# Altium PCB blackfin_pcb.PcbDoc (part 4 of 4)
Units mil, origin at the board's own origin, x right, y up, seen from the top; angles counter-clockwise.
Board outline 4330.71 x 5905.51 mil, 4 copper layers (Top Layer, GROUND, POWER, Bottom Layer), stack 59.76 mil thick; 381 components, 314 nets, 1218 pads, 647 vias.
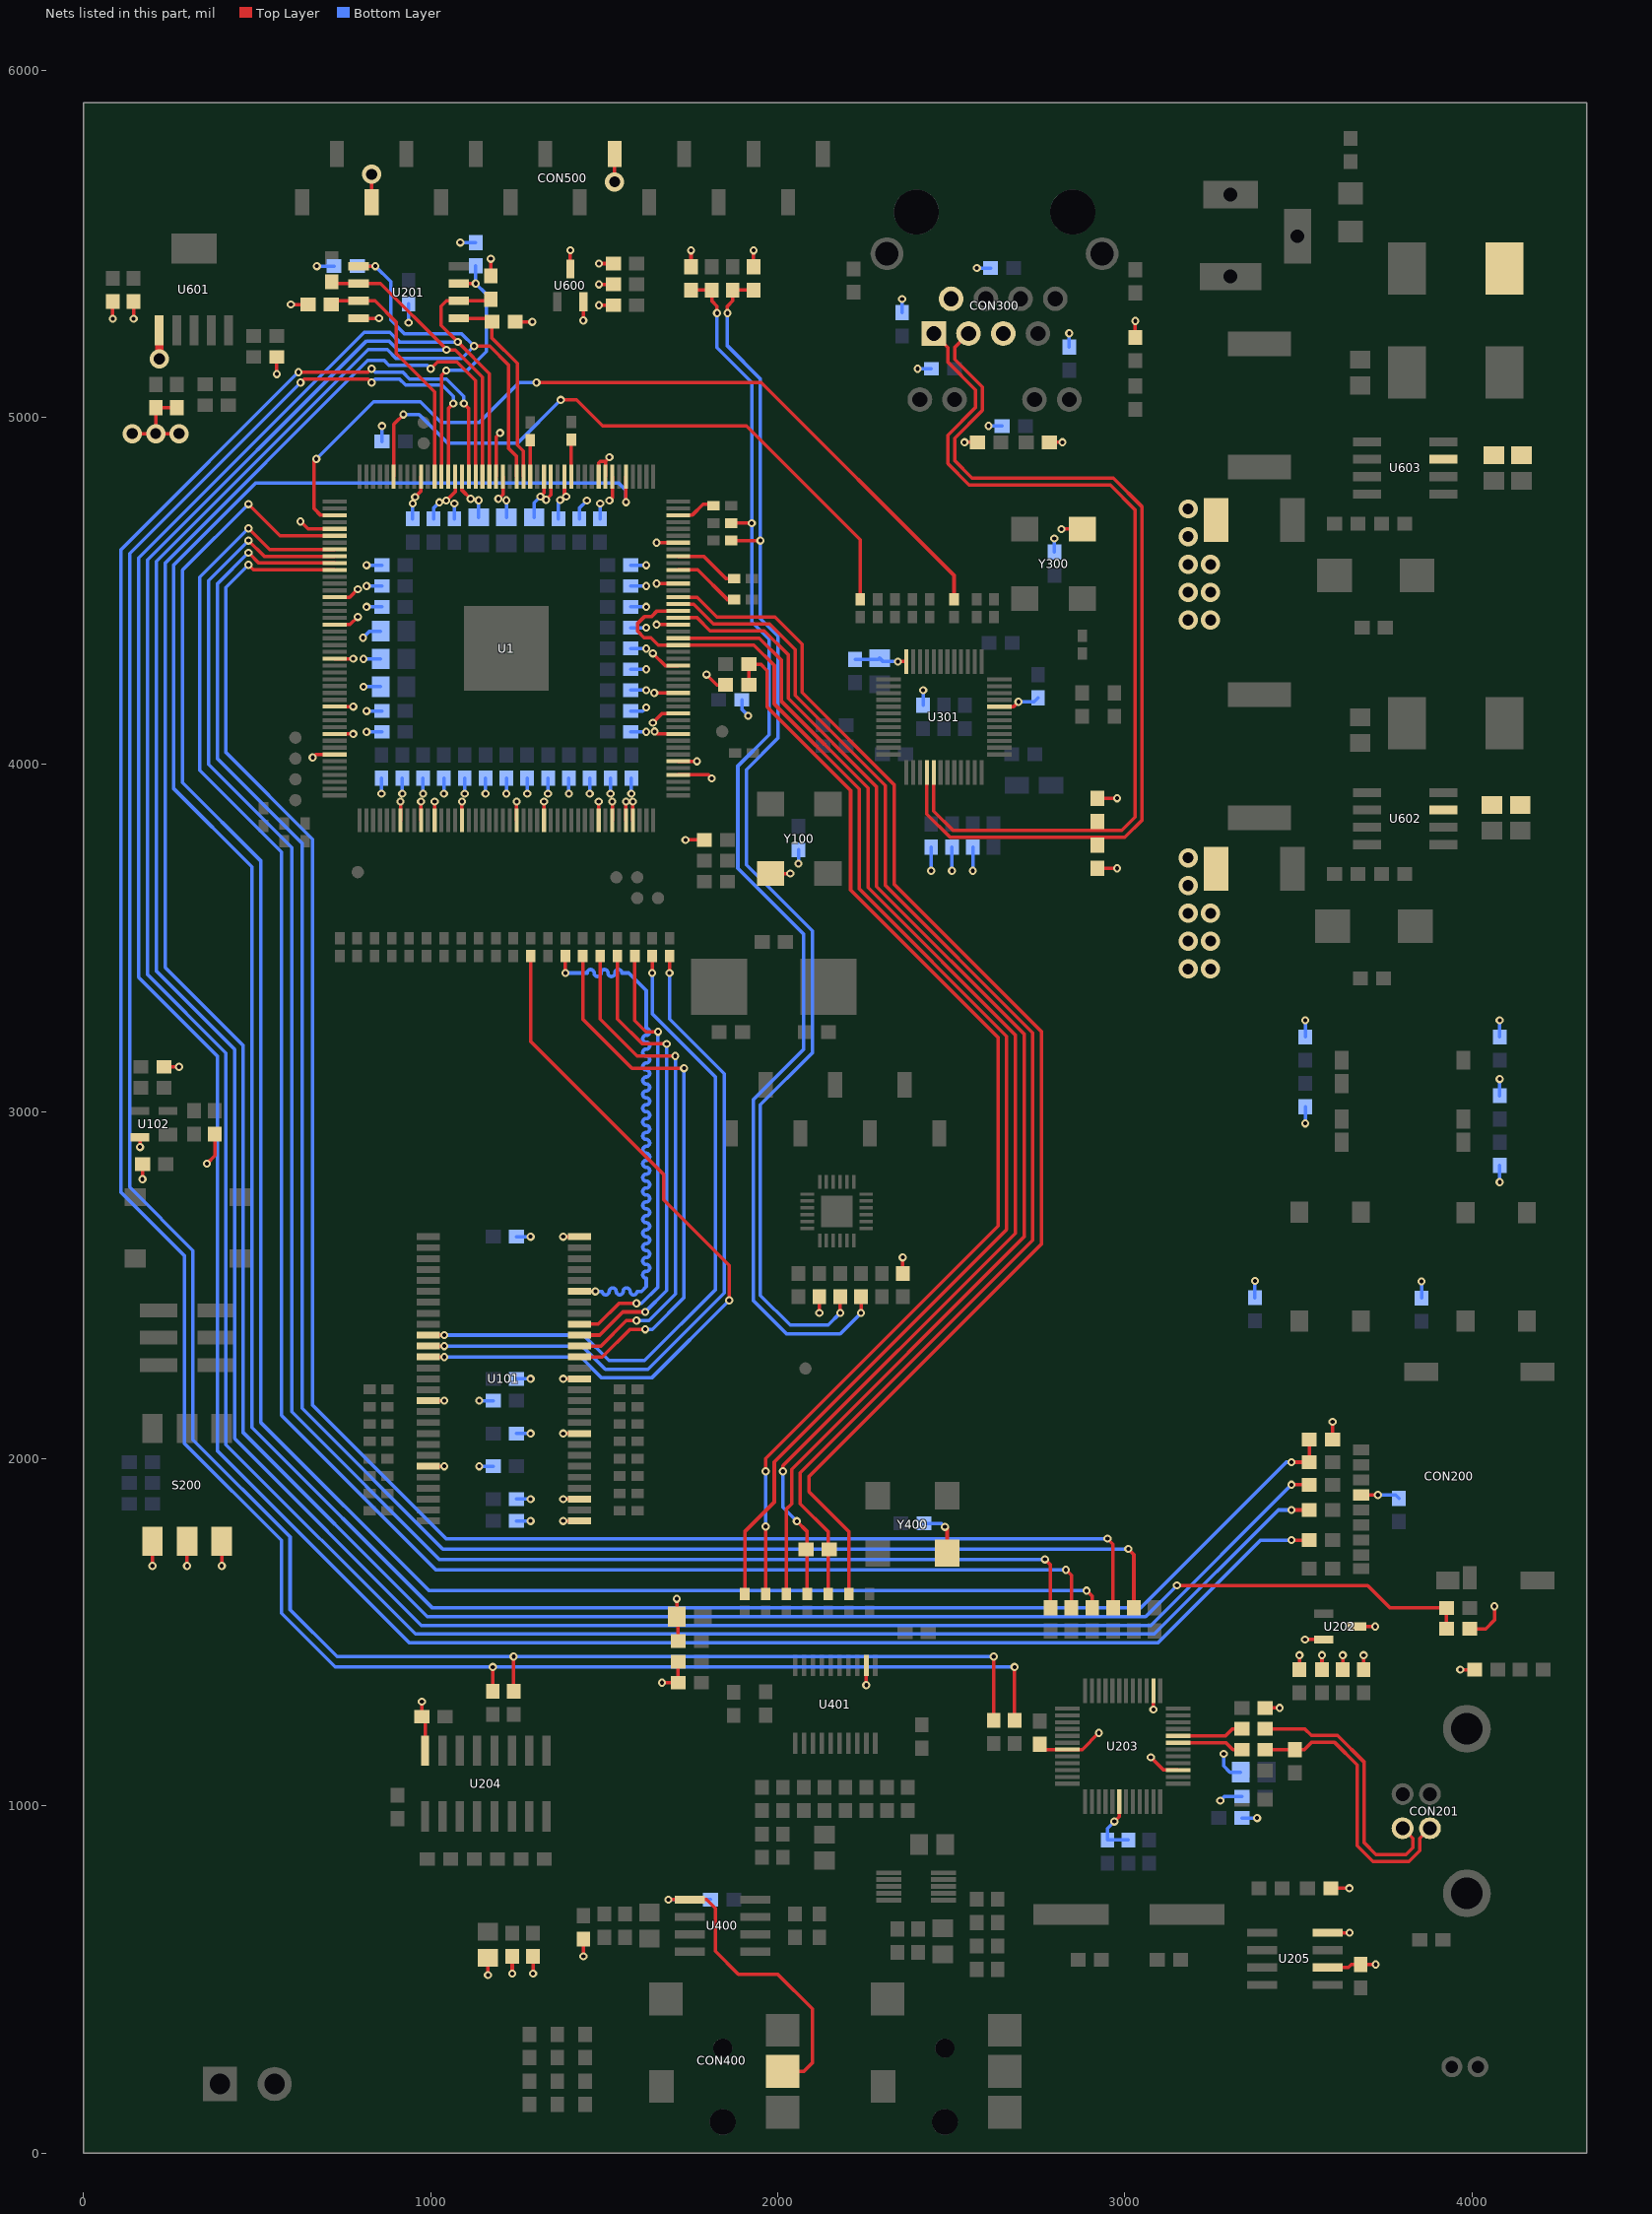
[diagram p6: the nets of this part, all layers, seen from the top]

## Via types
v1: diameter 23.62, hole 11.81, Top Layer to Bottom Layer, tented both sides, 566 vias
v2: diameter 55.12, hole 31.5, Top Layer to Bottom Layer, 36 vias
v3: diameter 25.98, hole 12.99, Top Layer to Bottom Layer, tented top, 29 vias
v4: diameter 157.48, hole 98.43, Top Layer to Bottom Layer, 8 vias
v5: diameter 55.12, hole 31.5, Top Layer to Bottom Layer, tented both sides, 4 vias
v6: diameter 137.8, hole 90.55, Top Layer to Bottom Layer, 4 vias

## Nets (pads, with @x,y where several pads share a name; then routed paths per layer and width w, separated by ;. In a path a pad name is that pad's centre, name@x,y a point inside that pad or via, vN(x,y) a via of type N, cw(c..) or ccw(c..) an arc to the next point about the centre after c; other vN are vias at no path point) (continued)
RXER: R315.1 U1.47 | length 2490.6
  Top Layer w10: v1(670.65,4880.3) 663.49,4873.13 663.49,4737.34 682.99,4717.83 U1.47@723.03,4717.83 ; v1(1305,5100) 1952.57,5100 2508,4544.57 R315.1@2508,4475.59
  Bottom Layer w10: v1(670.65,4880.3) 835.36,5045 970,5045 1030,4985 1140,4985 1255,5100 v1(1305,5100)
SA10: R139.1 U101.22 | length 1879.5
  Top Layer w10: v1(1388.11,3399.33) R139.1@1388.11,3448.39 ; U101.22@1428.26,2482.13 v1(1474.44,2482.13)
  Bottom Layer w10: v1(1388.11,3399.33) 1388.11,3399.22 1410.78,3399.22 1450.78,3399.22 cw(c1460.78,3399.22) 1470.78,3399.22 ccw(c1480.78,3399.22) 1490.78,3399.22 cw(c1500.78,3399.22) 1510.78,3399.22 ccw(c1520.78,3399.22) 1530.78,3399.22 cw(c1540.78,3399.22) 1550.78,3399.22 1570.78,3399.22 1621.02,3348.98 1621.02,3239.8 cw(c1621.02,3229.8) 1621.02,3219.8 ccw(c1621.02,3209.8) 1621.02,3199.8 cw(c1621.02,3189.8) 1621.02,3179.8 ccw(c1621.02,3169.8) 1621.02,3159.8 cw(c1621.02,3149.8) 1621.02,3139.8 ccw(c1621.02,3129.8) 1621.02,3119.8 cw(c1621.02,3109.8) 1621.02,3099.8 ccw(c1621.02,3089.8) 1621.02,3079.8 cw(c1621.02,3069.8) 1621.02,3059.8 ccw(c1621.02,3049.8) 1621.02,3039.8 cw(c1621.02,3029.8) 1621.02,3019.8 ccw(c1621.02,3009.8) 1621.02,2999.8 cw(c1621.02,2989.8) 1621.02,2979.8 ccw(c1621.02,2969.8) 1621.02,2959.8 cw(c1621.02,2949.8) 1621.02,2939.8 ccw(c1621.02,2929.8) 1621.02,2919.8 cw(c1621.02,2909.8) 1621.02,2899.8 ccw(c1621.02,2889.8) 1621.02,2879.8 cw(c1621.02,2869.8) 1621.02,2859.8 ccw(c1621.02,2849.8) 1621.02,2839.8 cw(c1621.02,2829.8) 1621.02,2819.8 ccw(c1621.02,2809.8) 1621.02,2799.8 cw(c1621.02,2789.8) 1621.02,2779.8 ccw(c1621.02,2769.8) 1621.02,2759.8 cw(c1621.02,2749.8) 1621.02,2739.8 ccw(c1621.02,2729.8) 1621.02,2719.8 cw(c1621.02,2709.8) 1621.02,2699.8 ccw(c1621.02,2689.8) 1621.02,2679.8 cw(c1621.02,2669.8) 1621.02,2659.8 ccw(c1621.02,2649.8) 1621.02,2639.8 cw(c1621.02,2629.8) 1621.02,2619.8 ccw(c1621.02,2609.8) 1621.02,2599.8 cw(c1621.02,2589.8) 1621.02,2579.8 ccw(c1621.02,2569.8) 1621.02,2559.8 cw(c1621.02,2549.8) 1621.02,2539.8 ccw(c1621.02,2529.8) 1621.02,2519.8 1621.02,2496.02 1607.13,2482.13 1594.44,2482.13 cw(c1584.44,2482.13) 1574.44,2482.13 ccw(c1564.44,2482.13) 1554.44,2482.13 cw(c1544.44,2482.13) 1534.44,2482.13 ccw(c1524.44,2482.13) 1514.44,2482.13 cw(c1504.44,2482.13) 1494.44,2482.13 v1(1474.44,2482.13)
SCAS: R141.1 U101.17 | length 1467.2
  Top Layer w10: U101.17@1428.26,2324.65 1490.46,2324.65 1563.66,2397.84 v1(1592.95,2397.84) ; R141.1@1488.11,3448.39 1488.11,3266.89 1595,3160 v1(1705,3160)
  Bottom Layer w10: v1(1592.95,2397.84) 1628.66,2397.84 1705,2474.18 v1(1705,3160)
SCKE: R135.1 U101.37 | length 1979.4
  Top Layer w10: U101.37@993.22,2356.14 v1(1039.41,2356.14) ; v1(1638.11,3399.33) R135.1@1638.11,3448.39
  Bottom Layer w10: v1(1039.41,2356.14) 1440.37,2356.14 1513.66,2282.84 1616.02,2282.84 1821.02,2487.84 1821.02,3098.98 1638.11,3281.89 v1(1638.11,3399.33)
SCL: R200.1 R202.1 R500.2 R504.2 | length 3695.2
  Top Layer w10: R200.1@1750.18,5366.54 R500.2@1810.18,5366.54 1810.18,5334.81 1825,5320 v1(1825,5300) ; R202.1@1865.59,4695 v1(1925,4695) ; v1(2240,2420) R504.2@2240,2466.54
  Bottom Layer w10: v1(1825,5300) 1825,5200.47 1925,5100.47 ; 1925,5100 v1(1925,4695) 1925,4410.47 1975,4360.47 1975,4085.36 1885,3995.36 1885,3700.36 2075,3510.36 2075,3179.64 1930,3034.64 1930,2455.47 2025.47,2360 2180,2360 v1(2240,2420)
SCLK: R145.2 U101.38 | length 2007.8
  Top Layer w10: U101.38@993.22,2324.65 v1(1039.41,2324.65) ; v1(1688.11,3399.33) R145.2@1688.11,3448.39
  Bottom Layer w10: v1(1039.41,2324.65) 1436.51,2324.65 1503.31,2257.84 1626.38,2257.84 1846.02,2477.49 1846.02,3108.98 1688.11,3266.89 v1(1688.11,3399.33)
SDA: R201.1 R203.1 R501.2 R503.2 | length 3611.2
  Top Layer w10: v1(1855,5300) 1855,5320 1870.18,5335.18 R501.2@1870.18,5366.54 R201.1@1930.18,5366.54 ; R203.1@1865.59,4645 v1(1950,4645) ; v1(2180,2420) R503.2@2180,2466.54
  Bottom Layer w10: v1(1855,5300) 1855,5205.83 1950,5110.83 v1(1950,4645) 1950,4420.83 2000,4370.83 2000,4075 1910,3985 1910,3710.71 2100,3520.71 2100,3169.29 1950,3019.29 1950,2470.83 2035.83,2385 2145,2385 v1(2180,2420)
SMS: R143.1 U101.19 | length 1272.9
  Top Layer w10: U101.19@1428.26,2387.64 1482.75,2387.64 1542.95,2447.84 v1(1592.95,2447.84) ; R143.1@1588.11,3448.39 1588.11,3261.89 1620,3230 v1(1655,3230)
  Bottom Layer w10: v1(1592.95,2447.84) 1607.95,2447.84 1655,2494.89 v1(1655,3230)
SPI_CLK: R219.2 R240.1 U1.26 U201.6 | length 8098.8
  Top Layer w10: R219.2@715,5390.27 720,5385.27 U201.6@791.81,5385.27 855.56,5385.27 v1@1041.85,5198.98 ; v1@1046.85,5193.98 1071.02,5193.98 1149.21,5115.79 U1.26@1149.21,4829.06 ; v1(3480,1852.36) R240.1@3531.54,1852.36
  Bottom Layer w10: v1(1045.7,5194.3) 905,5194.3 879.3,5220 815,5220 183.91,4588.91 183.91,3394.94 410,3168.84 410,2040.83 955.83,1495 3085.36,1495 3442.72,1852.36 v1(3480,1852.36)
SPI_CS_FLASH: R214.1 U1.20 U201.1 | length 583.2
  Top Layer w10: U201.1@1081.18,5285.27 1166.27,5285.27 R214.1@1176.54,5275 1176.54,5228.46 1250,5155 1250,4920 1267.32,4902.68 U1.20@1267.32,4829.06
SPI_CS_MICROSD: R238.1 R245.2 U1.5 | length 7595.3
  Top Layer w10: v1(1562.6,4755.51) U1.5@1562.6,4829.06 ; v1(3480,1990) R245.2@3531.54,1990 R238.1@3531.54,2055
  Bottom Layer w10: v1(1562.6,4755.51) 1562.6,4790 1542.6,4810 495,4810 260,4575 260,3930 485,3705 485,2090 1005,1570 3045,1570 3465,1990 v1(3480,1990)
SPI_DET: R244.2 R247.1 U1.27 | length 7862.7
  Top Layer w10: v1(1000,5140) 1020,5160 1075,5160 1129.53,5105.47 U1.27@1129.53,4829.06 ; v1(3150,1635) 3700,1635 3765,1570 R244.2@3927.13,1570 R247.1@3927.13,1510
  Bottom Layer w10: v1(1000,5140) 990,5150 880,5150 866.02,5163.98 818.98,5163.98 235,4580 235,3415 460,3190 460,2075 990,1545 3060,1545 v1(3150,1635)
SPI_HOLD: R215.1 U1.33 U201.7 | length 707.8
  Top Layer w10: R215.1@713.46,5325 723.73,5335.27 U201.7@791.81,5335.27 839.73,5335.27 901,5274 901,5184 1011.42,5073.58 U1.33@1011.42,4829.06
SPI_MISO: R212.1 R241.1 U1.25 U201.2 | length 8063.7
  Top Layer w10: U1.25@1168.9,4829.06 1168.9,5126.1 v1(1077.85,5217.15) 1030,5265 1030,5320 1045.27,5335.27 U201.2@1081.18,5335.27 1168.11,5335.27 R212.1@1173.11,5340.27 ; v1(3480,1765.75) R241.1@3531.54,1765.75
  Bottom Layer w10: v1(1077.85,5217.15) 910,5217.15 882.15,5245 808.93,5245 158.36,4594.43 158.36,3386.64 385,3160 385,2023.4 938.4,1470 3095.71,1470 3391.46,1765.75 v1(3480,1765.75)
SPI_MOSI: R211.1 R242.1 U1.21 U201.5 | length 8298.5
  Top Layer w10: U201.5@791.81,5435.27 v1(840.36,5435.27) ; v1(1125,5205) 1170,5205 1225,5150 1225,4910 1247.64,4887.36 U1.21@1247.64,4829.06 ; v1(3480,1925) R242.1@3531.54,1925
  Bottom Layer w10: R211.1@788.46,5435.27 v1(840.36,5435.27) 885,5390.63 885,5280 925,5240 1090,5240 v1(1125,5205) 1090,5170 900,5170 875,5195 820,5195 209.45,4584.45 209.45,3404.75 435,3179.2 435,2058.25 973.25,1520 3075,1520 v1(3480,1925)
SPI_W: R213.1 U1.32 U201.3 | length 757.1
  Top Layer w10: U1.32@1031.1,4829.06 1031.1,5121.1 v1(1045,5135) ; U201.3@1081.18,5385.27 v1(1129.73,5385.27)
  Bottom Layer w10: v1(1045,5135) 1105,5135 1160,5190 1160,5355 v1(1129.73,5385.27) R213.1@1129.73,5436.54
SPORT_CLK: R410.1 U1.155 U1.160 | length 3845.2
  Top Layer w10: U1.160@1713.19,4442.24 1652.24,4442.24 1635.45,4425.45 1615.45,4425.45 1596.85,4406.85 1596.85,4383.15 1615,4365 1635,4365 1656.18,4343.82 1931.54,4343.82 1990,4285.36 1990,4174.2 2235,3929.2 2235,3641.86 2659.65,3217.22 2659.65,2660 1990,1990.36 1990,1875 1905,1790 R410.1@1905,1618.46
SPORT_ENABLE: R206.1 R207.2 R409.1 | length 3325.5
  Top Layer w10: R207.2@1916.57,4228.98 R206.1@1916.57,4288.98 1951.02,4288.98 1969.65,4270.35 1969.65,4165.77 2210,3925.41 2210,3638.08 2634.65,3213.43 2634.65,2670.36 1965,2000.71 v1(1965,1963.62) ; R409.1@1965,1618.46 v1(1965,1805)
  Bottom Layer w10: v1(1965,1805) v1(1965,1963.62)
SPORT_RX: R406.1 U1.162 | length 3751.6
  Top Layer w10: U1.162@1713.19,4481.61 1768.39,4481.61 1825,4425 1991.78,4425 2070,4346.78 2070,4207.34 2335,3942.34 2335,3655 2759.65,3230.35 2759.65,2618.58 2090,1948.93 2090,1905 2205,1790 R406.1@2205,1618.46
SPORT_RX_FSYNC: R404.1 R408.1 U1.161 | length 3697.9
  Top Layer w10: U1.161@1713.19,4461.93 1758.07,4461.93 1815,4405 1976.42,4405 2050,4331.42 2050,4199.05 2310,3939.05 2310,3651.72 2734.65,3227.07 2734.65,2628.93 2065,1959.29 2065,1870 2145,1790 R408.1@2145,1618.46
SPORT_TX: R405.1 U1.159 | length 3623.6
  Top Layer w10: U1.159@1713.19,4422.56 1767.44,4422.56 1805,4385 1961.07,4385 2030,4316.07 2030,4190.77 2285,3935.77 2285,3648.43 2709.65,3223.79 2709.65,2639.29 2040,1969.64 2040,1870 2025,1855 R405.1@2025,1618.46
SPORT_TX_FSYNC: R404.2 R407.1 U1.156 | length 3590.9
  Top Layer w10: U1.156@1713.19,4363.5 1947.21,4363.5 2010,4300.71 2010,4182.48 2260,3932.48 2260,3645.15 2684.65,3220.5 2684.65,2649.65 2015,1980 v1(2015,1963.62) ; v1(2055,1820) 2085,1790 R407.1@2085,1618.46
  Bottom Layer w10: v1(2015,1963.62) 2015,1860 v1(2055,1820)
SRAS: R142.1 U101.18 | length 1368.5
  Top Layer w10: U101.18@1428.26,2356.14 1486.6,2356.14 1553.31,2422.84 v1(1617.95,2422.84) ; R142.1@1538.11,3448.39 1538.11,3266.89 1610,3195 v1(1680,3195)
  Bottom Layer w10: v1(1617.95,2422.84) 1618.31,2422.84 1680,2484.54 v1(1680,3195)
SWE: R137.1 U101.16 | length 1565.8
  Top Layer w10: U101.16@1428.26,2293.15 1494.32,2293.15 1574.02,2372.84 v1(1617.95,2372.84) ; R137.1@1438.11,3448.39 1438.11,3266.89 1580,3125 v1(1730,3125)
  Bottom Layer w10: v1(1617.95,2372.84) 1639.02,2372.84 1730,2463.83 v1(1730,3125)
T\R\S\T\: R225.2 U1.54 | length 5588
  Top Layer w10: v1(475,4610) 504.96,4580.04 U1.54@723.03,4580.04 ; v1(3010,1740) 3026.02,1723.98 R225.2@3026.02,1570.57
  Bottom Layer w10: v1(475,4610) 385,4520 385,4017.57 630,3772.57 630,2145 1035,1740 v1(3010,1740)
TCK: R220.2 U1.53 | length 5415.9
  Top Layer w10: v1(475,4645) 520.28,4599.72 U1.53@723.03,4599.72 ; v1(2770,1710) 2786.02,1693.98 R220.2@2786.02,1570.57
  Bottom Layer w10: v1(475,4645) 360,4530 360,4000.15 600,3760.15 600,2135 1025,1710 v1(2770,1710)
TD_N: CON300.3 R308.1 U301.16 | length 2757.2
  Top Layer w10: U301.16@2429.61,3977.44 2429.61,3857.11 2496.72,3790 2920,3790 2920.73,3789.27 R308.1@2920.73,3767.63 ; CON300.3@2549.65,5241.43 2510,5201.78 2510,5167.18 2590,5087.18 2590,5020 2510,4940 2510,4875 2560,4825 2966.72,4825 3050,4741.72 3050,3840 3000,3790 2920.73,3790
TD_P: CON300.1 R307.1 U301.17 | length 2695.3
  Top Layer w10: U301.17@2449.61,3977.44 2449.61,3865.39 2505,3810 2920,3810 ; CON300.1@2449.65,5241.43 2490,5201.07 2490,5158.9 2570,5078.9 2570,5028.28 2490,4948.28 2490,4866.72 2551.72,4805 2958.43,4805 3030,4733.43 3030,3848.28 2991.72,3810 2920,3810 ; R307.1@2920.73,3835.7 2920.73,3810.73 2920,3810
TDI: R221.2 U1.52 | length 5543.8
  Top Layer w10: v1(475,4680) 535.59,4619.41 U1.52@723.03,4619.41 ; v1(2830,1680) 2846.02,1663.98 R221.2@2846.02,1570.57
  Bottom Layer w10: v1(475,4680) 335,4540 335,3982.72 570,3747.72 570,2125 1015,1680 v1(2830,1680)
TDO: R222.2 U1.50 | length 5739.7
  Top Layer w10: v1(475,4750) 566.22,4658.78 U1.50@723.03,4658.78 ; v1(2890,1620) 2906.02,1603.98 R222.2@2906.02,1570.57
  Bottom Layer w10: v1(475,4750) 285,4560 285,3947.87 510,3722.87 510,2105 995,1620 v1(2890,1620)
TIP: CON400.3 R400.2 U400.5 | length 990.8
  Top Layer w10: v1(1685,730) 1795,730 1820,705 1820,581.57 1886.57,515 2000,515 2100,415 2100,260 2075.31,235.31 CON400.3@2013.78,235.31
  Bottom Layer w10: v1(1685,730) R400.2@1806.54,730
TMS: R223.2 U1.55 | length 5460.3
  Top Layer w10: v1(475,4575) 489.65,4560.35 U1.55@723.03,4560.35 ; v1(2950,1770) 2966.02,1753.98 R223.2@2966.02,1570.57
  Bottom Layer w10: v1(475,4575) 410,4510 410,4035 660,3785 660,2154.65 1044.65,1770 v1(2950,1770)
TXCLK: R300.1 U1.39 | length 1950.7
  Top Layer w10: U1.39@893.31,4829.06 893.31,4980 ; 906.49,4993.18 893.31,4980 ; v1(921.61,5008.31) 893.31,4980 ; v1(1375,5050) 1420,5050 1495,4975 1910.08,4975 2238,4647.08 R300.1@2238,4475.59
  Bottom Layer w10: v1(921.61,5008.31) 966.69,5008.31 1050,4925 1250,4925 v1(1375,5050)
TXD0: R304.1 U1.174 | length 109.5
  Top Layer w10: U1.174@1713.19,4717.83 1752.83,4717.83 1785,4750 R304.1@1809.41,4750
TXD1: R305.1 U1.168 | length 188
  Top Layer w10: U1.168@1713.19,4599.72 1786.1,4599.72 1850.83,4535 R305.1@1874.41,4535
TXD2: R311.1 U1.19 | length 104.3
  Top Layer w10: U1.19@1287.01,4829.06 R311.1@1287.01,4933.39
TXD3: R312.1 U1.13 | length 105.8
  Top Layer w10: U1.13@1405.12,4829.06 R312.1@1405.12,4934.88
TXEN: R302.1 U1.166 | length 196.6
  Top Layer w10: U1.166@1713.19,4560.35 1769.65,4560.35 1855,4475 R302.1@1874.41,4475
UART_RX: R231.1 R233.2 U1.28 | length 7129.7
  Top Layer w10: v1(618.87,5130) 820,5130 ; 820.25,5130 820,5130 ; v1(830,5140) 820,5130 ; v1(1095.63,5040) 1109.84,5025.79 U1.28@1109.84,4829.06 ; R231.1@1178.98,1330.35 v1(1178.98,1400) ; R233.2@2682.18,1246.35 v1(2682.18,1400)
  Bottom Layer w10: v1(618.87,5130) 107.27,4618.4 107.27,2767.73 290,2585 290,2044.64 570,1764.64 570,1554.64 724.64,1400 v1(1178.98,1400) v1(2682.18,1400) ; v1(830,5140) 840,5130 920,5130 939.59,5110.41 1045.41,5110.41 1095.63,5060.2 v1(1095.63,5040)
UART_TX: R229.1 R232.2 U1.31 | length 7007.2
  Top Layer w10: v1(625.25,5100) 635.25,5110 820.25,5110 v1(830,5100.25) ; U1.31@1050.79,4829.06 1050.79,5025.79 v1(1065,5040) ; R229.1@1238.98,1330.35 v1(1238.98,1430) ; R232.2@2622.18,1246.35 v1(2622.18,1430)
  Bottom Layer w10: v1(625.25,5100) 625,5100 132.81,4607.81 132.81,2782.19 315,2600 315,2055 595,1775 595,1565 730,1430 v1(1238.98,1430) v1(2622.18,1430) ; v1(830,5100.25) 840,5110.25 910,5110.25 927.34,5092.91 1032.91,5092.91 1065,5060.83 v1(1065,5040)
UDQM: R136.2 U101.39 | length 2213.4
  Top Layer w10: U101.39@993.22,2293.15 v1(1039.41,2293.15) ; R136.2@1288.11,3448.39 1288.11,3201.89 1671.02,2818.98 1671.02,2745.75 1860.03,2556.74 v1(1860.03,2456.14)
  Bottom Layer w10: v1(1039.41,2293.15) 1432.65,2293.15 1492.95,2232.84 1636.73,2232.84 v1(1860.03,2456.14)
USB_CONN_N: CON201.2 R224.1 | length 787.6
  Top Layer w10: R224.1@3404.49,1222.11 3518.2,1222.11 3537.73,1202.58 3613.13,1202.58 3690,1125.71 3690,893.28 3723.28,860 3810,860 3829.76,879.76 3829.76,906.18 CON201.2@3800.39,935.55
USB_CONN_P: CON201.3 R226.1 R228.1 | length 821.1
  Top Layer w10: R226.1@3404.49,1162.11 3517.11,1162.11 3537.58,1182.58 3604.84,1182.58 3670,1117.43 3670,885 3715,840 3818.28,840 3849.76,871.48 3849.76,906.18 CON201.3@3879.13,935.55
USB_N: R224.2 U203.8 | length 192.8
  Top Layer w10: U203.8@3153.23,1201.64 3290.04,1201.64 3310.52,1222.11 R224.2@3337.56,1222.11
USB_P: R226.2 U203.7 | length 191.1
  Top Layer w10: U203.7@3153.23,1181.95 3290.04,1181.95 ; 3291.45,1181.95 3311.3,1162.11 R226.2@3337.56,1162.11
VCC1V3: C614.2 C625.2 C626.2 C627.2 C628.2 C629.2 C630.2 C631.2 C632.2 C633.2 C634.2 C635.2 C636.2 R600.2 U1.14 U1.23 U1.30 U1.63 U1.79 U1.98 U1.100 U1.116 U1.138 U1.152 U1.164 | length 1538.8
  Top Layer w10: v2(140,4953.11) v2(208.11,4953.11) ; R600.2@268.11,5027.72 C614.2@208.11,5027.72 v2(208.11,4953.11) ; v2(275,4953.11) v2(208.11,4953.11) ; U1.79@723.03,4087.91 v1(777.01,4087.91) ; U1.63@723.03,4402.87 767.87,4402.87 v1(790,4425) ; U1.98@972.05,3838.9 v1(972.05,3892.87) ; U1.100@1011.42,3838.9 v1(1011.42,3892.87) ; v1(1045,4760) 1070.47,4785.47 U1.30@1070.47,4829.06 ; v1(1195,4765) 1208.27,4778.27 U1.23@1208.27,4829.06 ; U1.116@1326.38,3838.9 v1(1326.38,3892.87) ; U1.14@1385.43,4829.06 1385.43,4776.77 v1(1390.43,4771.77) ; v1(1640,4320) 1675.24,4284.76 U1.152@1713.19,4284.76 ; v1(1650.98,4520.98) U1.164@1713.19,4520.98 ; U1.138@1713.19,4009.17 v1(1767.17,4009.17)
  Bottom Layer w10: v1(815.2,4093.98) C636.2@859.65,4093.98 ; v1(815.2,4453.98) C630.2@859.65,4453.98 ; v1(978.11,3916.06) C626.2@978.11,3960.51 ; C633.2@1008.11,4707.44 1008.11,4738.11 v1(1025,4755) ; v1(1038.11,3916.06) C635.2@1038.11,3960.51 ; C634.2@1068.11,4707.44 v1(1068.11,4751.89) ; C625.2@1218.11,4711.38 v1(1218.11,4760.83) ; v1(1338.11,3916.06) C627.2@1338.11,3960.51 ; C631.2@1368.11,4707.44 1368.11,4756.89 v1(1373.11,4761.89) ; C629.2@1576.57,4153.98 1611.02,4153.98 v1(1621.02,4163.98) ; C632.2@1576.57,4333.98 v1(1621.02,4333.98) ; C628.2@1576.57,4513.98 v1(1621.02,4513.98)
VCC2V5: C654.2 U1.8 U1.9 U600.2 | length 217.6
  Top Layer w10: v1(1439.8,5278.84) U600.2@1439.8,5332.81 ; U1.9@1483.86,4829.06 1483.86,4868.86 1488.54,4873.54 1503.54,4873.54 ; v1(1485,5322.81) C654.2@1526.54,5322.81 ; U1.8@1503.54,4829.06 1503.54,4873.54 ; v1(1515,4885) 1503.54,4873.54
VCC3V3: C100.2 C104.2 C105.2 C106.2 C107.2 C108.2 C109.2 C110.2 C111.2 C200.2 C210.2 C218.2 C300.2 C301.2 C302.2 C309.2 C310.2 C311.1 C312.1 C313.2 C406.2 C407.2 C408.2 C414.2 C600.2 C601.2 C602.2 C603.2 C604.2 C605.2 C606.2 C607.2 C608.2 C609.2 C610.2 C611.2 C612.2 C613.2 C615.2 C616.2 C617.2 C618.2 C619.2 C620.2 C621.2 C622.2 C623.2 C624.2 C637.2 C638.2 C639.2 C640.2 C641.2 C652.2 C653.2 CON200.4 CON300.2 CON300.5 L300.1 L401.1 R144.2 R147.2 R149.2 R150.1 R200.2 R201.2 R207.1 R211.2 R212.2 R213.2 R214.2 R215.2 R238.2 R239.1 R247.2 R301.1 R303.1 R307.2 R308.2 R309.2 R310.2 R320.2 R321.2 R322.2 R328.1 R502.2 R507.1 R508.1 R509.1 R510.1 R511.1 R515.1 R516.1 R601.2 R605.2 S200.4 S200.5 S200.6 U1.7 U1.16 U1.17 U1.24 U1.29 U1.35 U1.49 U1.59 U1.68 U1.75 U1.82 U1.95 U1.104 U1.112 U1.124 U1.126 U1.128 U1.129 U1.136 U1.142 U1.145 U1.148 U1.158 U1.170 U101.1 U101.3 U101.9 U101.14 U101.27 U101.43 U101.49 U102.4 U201.8 U204.16 U301.32 U301.48 U401.12 U600.3 U601.1 Y100.4 Y300.4 Y400.4 | length 7440.4
  Top Layer w10: v1(83.98,5283.98) C613.2@83.98,5333.43 ; v1(143.98,5283.98) C612.2@143.98,5333.43 ; v1(162.4,2897.91) U102.4@162.4,2926.1 ; v1(169.65,2805.35) C104.2@169.65,2848.98 ; v1(198.11,1691.11) S200.4@198.11,1762.17 ; R149.2@231.57,3128.98 v1(274.77,3128.98) ; v1(298.11,1691.11) S200.5@298.11,1762.17 ; v1(355,2850) 378.11,2873.11 R150.1@378.11,2935.51 ; v1(398.11,1691.11) S200.6@398.11,1762.17 ; v1(556.57,5124.53) R601.2@556.57,5173.98 ; v1(597.09,5325) R215.2@646.54,5325 ; v1(625,4700) 646.54,4678.46 U1.49@723.03,4678.46 ; v1(660,4020) 668.86,4028.86 U1.82@723.03,4028.86 ; U1.75@723.03,4166.65 v1(777.01,4166.65) ; U1.68@723.03,4304.45 v1(777.01,4304.45) ; U1.59@723.03,4481.61 766.61,4481.61 v1(790,4505) ; U201.8@791.81,5285.27 v1(850.99,5285.27) ; U1.95@912.99,3838.9 v1(912.99,3892.87) ; v1(955,4770) 972.05,4787.05 U1.35@972.05,4829.06 ; v1(974.51,1300.29) C210.2@974.51,1256.89 983.98,1247.43 U204.16@983.98,1158.62 ; U101.49@993.22,1978.19 v1(1039.41,1978.19) ; U101.43@993.22,2167.17 v1(1039.41,2167.17) ; U1.104@1090.16,3838.9 v1(1090.16,3892.87) ; U1.29@1090.16,4829.06 1090.16,4789.84 v1(1115,4765) ; R212.2@1173.11,5407.2 v1(1173.11,5456.65) ; U1.24@1188.58,4829.06 1188.58,4943.58 v1(1200,4955) ; R214.2@1243.46,5275 v1(1292.91,5275) ; U1.112@1247.64,3838.9 v1(1247.64,3892.87) ; v1(1316.38,4771.77) 1326.38,4781.77 U1.17@1326.38,4829.06 ; v1(1332.5,4762.5) 1346.06,4776.06 U1.16@1346.06,4829.06 ; v1(1382.08,1820.71) U101.1@1428.26,1820.71 ; v1(1382.08,1883.7) U101.3@1428.26,1883.7 ; v1(1382.08,2072.68) U101.9@1428.26,2072.68 ; v1(1382.08,2230.16) U101.14@1428.26,2230.16 ; v1(1382.08,2639.61) U101.27@1428.26,2639.61 ; U600.3@1402.4,5427.3 v1(1402.4,5481.28) ; U1.124@1483.86,3838.9 v1(1483.86,3892.87) ; v1(1485,5382.81) C652.2@1526.54,5382.81 ; v1(1485,5442.81) C653.2@1526.54,5442.81 ; v1(1515,4760) 1523.23,4768.23 U1.7@1523.23,4829.06 ; U1.126@1523.23,3838.9 v1(1523.23,3892.87) ; U1.128@1562.6,3838.9 v1(1562.6,3892.87) ; U1.129@1582.28,3838.9 v1(1582.28,3892.87) ; v1(1640,4120) 1666.97,4146.97 U1.145@1713.19,4146.97 ; v1(1644.21,4206.02) U1.148@1713.19,4206.02 ; v1(1645,4095) 1652.09,4087.91 U1.142@1713.19,4087.91 ; v1(1650.98,4402.87) U1.158@1713.19,4402.87 ; v1(1650.98,4639.09) U1.170@1713.19,4639.09 ; v1(1666.54,1355) L401.1@1713.07,1355 C407.2@1713.07,1415 ; v1(1709.13,1596.54) C406.2@1709.13,1545 1713.07,1541.06 C408.2@1713.07,1475 ; U1.136@1713.19,3969.8 1800.2,3969.8 v1(1810,3960) ; v1(1734.21,3782.54) R144.2@1788.19,3782.54 ; R200.2@1750.18,5433.46 v1(1750.18,5480.87) ; v1(1794.84,4258.98) 1824.84,4228.98 R207.1@1849.65,4228.98 ; R201.2@1930.18,5433.46 v1(1930.18,5480.87) ; Y100.4@1979.29,3685.88 v1@2031.14,3685.88 ; v1(2120,2420) R502.2@2120,2466.54 ; v1(2254.92,1347.87) U401.12@2254.92,1404.41 ; v1(2346.34,4296.34) U301.48@2370.71,4296.34 ; R239.1@2360,2533.46 v1(2360,2580) ; v1(2481.93,1803.84) 2488.11,1797.66 Y400.4@2488.11,1728.48 ; v1(2538.24,4927.98) R309.2@2575.65,4927.98 ; U301.32@2638.43,4166.42 2679.69,4166.42 v1(2693.62,4180.35) ; R310.2@2782.57,4927.98 v1(2819.98,4927.98) ; v1(2817.24,4678.11) Y300.4@2877.38,4678.11 ; R308.2@2920.73,3700.7 v1(2977.63,3700.7) ; R307.2@2920.73,3902.63 v1(2977.63,3902.63) ; R320.2@3030.11,5229.93 v1(3030.11,5277.33) ; R238.2@3598.46,2055 v1(3598.46,2106.54) ; CON200.4@3681.06,1895.67 v1(3729.33,1895.67) ; R247.2@3994.06,1510 4040,1510 4065,1535 v1(4065,1575)
  Top Layer w25: v2@218.11,5163.11 U601.1@218.11,5249.92
  Bottom Layer w10: v1(672.09,5435.27) R211.2@721.54,5435.27 ; v1(805,4365) 823.98,4383.98 C615.2@855.71,4383.98 ; v1(806.26,4223.98) C600.2@855.71,4223.98 ; v1(806.26,4303.98) C616.2@855.71,4303.98 ; v1(815.2,4153.98) C618.2@859.65,4153.98 ; v1(815.2,4513.98) C617.2@859.65,4513.98 ; v1(815.2,4573.98) C603.2@859.65,4573.98 ; v1(858.11,3916.06) C619.2@858.11,3960.51 ; R328.1@859.84,4930 v1(859.84,4974.84) ; v1(918.11,3916.06) C641.2@918.11,3960.51 ; v1(936.18,5272.38) C200.2@936.18,5326.8 ; C639.2@948.11,4707.44 v1(948.11,4751.89) ; v1(1085.31,5503.46) R213.2@1129.73,5503.46 ; v1(1098.11,3916.06) C620.2@1098.11,3960.51 ; C601.2@1138.11,4711.38 v1(1138.11,4760.83) ; v1(1140.16,1978.19) C108.2@1180.51,1978.19 ; v1(1140.16,2167.17) C107.2@1180.51,2167.17 ; v1(1158.11,3916.06) C640.2@1158.11,3960.51 ; v1(1218.11,3916.06) C624.2@1218.11,3960.51 ; C105.2@1247.44,1820.71 v1(1287.8,1820.71) ; C106.2@1247.44,1883.7 v1(1287.8,1883.7) ; C109.2@1247.44,2072.68 v1(1287.8,2072.68) ; C110.2@1247.44,2230.16 v1(1287.8,2230.16) ; C111.2@1247.44,2639.61 v1(1287.8,2639.61) ; v1(1278.11,3916.06) C621.2@1278.11,3960.51 ; C637.2@1298.11,4711.38 1298.11,4753.5 v1(1316.38,4771.77) ; v1(1398.11,3916.06) C623.2@1398.11,3960.51 ; C638.2@1428.11,4707.44 1428.11,4738.11 v1(1450,4760) ; v1(1458.11,3916.06) C622.2@1458.11,3960.51 ; C602.2@1488.11,4707.44 v1(1488.11,4751.89) ; v1(1518.11,3916.06) C604.2@1518.11,3960.51 ; C606.2@1576.57,4093.98 v1(1621.02,4093.98) ; C607.2@1576.57,4213.98 v1(1621.02,4213.98) ; C608.2@1576.57,4273.98 v1(1621.02,4273.98) ; C609.2@1576.57,4393.98 v1(1621.02,4393.98) ; C610.2@1576.57,4453.98 v1(1621.02,4453.98) ; C611.2@1576.57,4573.98 v1(1621.02,4573.98) ; v1(1578.11,3916.06) C605.2@1578.11,3960.51 ; R147.2@1896.57,4186.34 1896.57,4158.43 v1(1915,4140) ; v1(2059.65,3714.51) C100.2@2059.65,3754.15 ; C301.2@2223.11,4302.44 2289.88,4302.44 C300.2@2293.66,4306.22 2303.54,4296.34 v1(2346.34,4296.34) ; C312.1@2358.11,5301.44 v1(2358.11,5340.87) ; v1(2403.13,5140) R322.2@2442.56,5140 ; L300.1@2418.98,4170.35 v1(2418.98,4213.78) ; C414.2@2421.57,1813.84 2471.93,1813.84 v1(2481.93,1803.84) ; v1(2442,3693.94) C309.2@2442,3761.54 ; v1(2502,3693.94) R301.1@2502,3761.54 ; v1(2562,3693.94) R303.1@2562,3761.54 ; v1(2573.65,5430) C311.1@2613.07,5430 ; v1(2607.11,4975) C310.2@2646.54,4975 ; v1(2693.62,4180.35) 2738.82,4180.35 C302.2@2750,4191.54 ; C313.2@2797.02,4611.57 v1(2797.02,4651) ; R321.2@2839.8,5202.44 v1(2839.8,5241.87) ; R516.1@3375,2463.94 v1(3375,2512.05) ; v1(3520,2966.14) R508.1@3520,3014.25 ; R507.1@3520,3215.04 v1(3520,3263.15) ; v1(3729.33,1895.67) 3780.16,1895.67 C218.2@3790,1885.83 ; R515.1@3855,2462.94 v1(3855,2511.05) ; v1(4080,2796.85) R509.1@4080,2844.96 ; R510.1@4080,3045.75 v1(4080,3093.86) ; R511.1@4080,3215.04 v1(4080,3263.15)
  other v1: 2036.14,3685.88
  other v2: 3182.25,3411.09 3247.25,3411.09 3182.25,3491.09 3247.25,3491.09 3182.25,3571.09 3247.25,3571.09 3182.25,3651.09 3182.25,3731.09 218.11,5168.11
VCC3V3_USB: C203.2 R230.1 R236.1 U202.2 U203.14 U203.31 | length 387.1
  Top Layer w10: R236.1@2755,1177.54 2770.27,1162.27 U203.31@2834.33,1162.27 2877.27,1162.27 v1(2925,1210) ; v1(3082.36,1277.58) U203.14@3082.36,1331.56 ; R230.1@3404.49,1282.11 v1(3446.02,1282.11) ; C203.2@3503.11,1392.44 v1(3503.11,1433.98) ; v1(3519.13,1479.17) U202.2@3573.11,1479.17
VCC5V: C400.2 C401.2 C402.2 CON500.3 CON500.10 L400.1 R608.2 | length 361.1
  Top Layer w10: CON500.3@829.92,5619 v5(829.92,5700) ; v1(1165,512.81) C402.2@1165,562.6 ; v1(1235,516.75) C400.2@1235,566.54 ; v1(1295,516.75) C401.2@1295,566.54 ; v1(1440,566.75) L400.1@1440,616.54 ; v5(1529.92,5677.95) CON500.10@1529.92,5758.96
  other v2: 3182.25,4416.09 3247.25,4416.09 3182.25,4496.09 3247.25,4496.09 3182.25,4576.09 3247.25,4576.09 3182.25,4656.09 3182.25,4736.09
VCC5V_USB: C201.2 C202.2 C204.2 C205.2 C206.2 C207.2 C217.2 L200.2 R216.1 R217.2 R235.2 U202.3 U203.3 U203.42 U205.6 U205.8 | length 960.2
  Top Layer w10: v1(2970,955) 2983.94,968.94 U203.42@2983.94,1012.66 ; v1(3075,1140) 3111.79,1103.21 U203.3@3153.23,1103.21 ; C201.2@3568.11,1392.44 v1(3568.11,1433.98) ; U205.6@3584.06,534.51 3644.07,534.51 3652.54,542.98 v1(3722.97,542.98) ; U205.8@3584.06,634.51 v1(3647.46,634.51) ; R235.2@3593.46,762.82 v1(3646.87,762.82) ; C202.2@3628.11,1392.44 v1(3628.11,1433.98) ; U202.3@3667.6,1516.57 v1(3721.57,1516.57) ; L200.2@3688.11,1392.44 v1(3688.11,1433.98) ; v1(3966.54,1392.44) R217.2@4008.07,1392.44
  Bottom Layer w10: v1(2970,955) 2950.02,935.02 C207.2@2950.02,901.57 C206.2@3010.02,901.57 ; v1(3275,1015) 3287.11,1027.11 C205.2@3337.56,1027.11 ; v1(3285,1150) 3285,1115 3302.89,1097.11 C204.2@3333.62,1097.11 ; R216.1@3337.56,965 v1(3381.24,965)
VCC9V: C643.2 C644.2 C648.2 C649.2 D601.2 U602.7 U603.7
pads on no net: CON200. CON200.1 CON200.8 CON202.3 CON202.4 CON300. CON300.7 CON400. CON401. CON500.1 CON500.4 CON500.5 CON500.6 CON500.11 CON500.12 CON500.13 CON500.14 CON500.15 CON500.16 U1.127 U101.40 U203.11 U203.12 U203.13 U203.15 U203.16 U203.17 U203.27 U203.28 U203.29 U203.30 U203.32 U203.33 U203.35 U203.36 U203.37 U203.38 U203.41 U204.7 U204.8 U204.9 U204.10 U205.7 U301.8 U301.9 U301.10 U301.11 U301.12 U301.25 U301.33 U401.6 U602.2 U602.3 U602.5 U603.2 U603.3 U603.5 Y100.1 Y300.1 Y400.1
copper on no net:
  other v4: 1165.35,407.09 3165.35,407.09 1165.35,3207.09 3165.35,3207.09 334.65,3523.62 3996.06,3523.62 334.65,5688.98 3996.06,5688.98
  other v6: 235.51,356.46 707.95,356.46 235.51,1576.93 707.95,1576.93

## Polygon pours and split planes (outlines as drawn)
VCC1V3 on Top Layer "Bottom Layer-No Net" (solid, pour order 1000): 95,5025 95,4935 125,4905 295,4905 325,4935 325,5020.85 305.85,5040 110,5040
NetC642_2 on Top Layer "Top Layer-No Net" (solid, pour order 1000): 3135,4290 4200,4290 4200,3965 4045,3965 3970,3890 3860,3890 3860,3945 3980,4065 3980,4228.98 3733.98,4228.98 3733.98,4118.84 3136.16,4118.84 3135,4120
NetC647_1 on Top Layer "Top Layer-No Net" (solid, pour order 1001): 3625,5100 3730,5100 3730,5015 3757.11,4987.89 3757.11,4920 3625,4920
NetC642_1 on Top Layer "Top Layer-No Net" (solid, pour order 1002): 3625,4070 3730,4070 3730,3985 3757.11,3957.89 3757.11,3910 3625,3910
NetC647_2 on Top Layer "Top Layer-No Net" (solid, pour order 1003): 3135,5300 4200,5300 4200,4975 4045,4975 3970,4900 3860,4900 3860,4955 3980,5075 3980,5238.98 3733.98,5238.98 3733.98,5140 3135,5140
NetR609_1 on Top Layer "Top Layer-No Net" (solid, pour order 1004): 3645,4790 3645,4685 3757.11,4685 3757.11,4790
NetR606_1 on Top Layer "Top Layer-No Net" (solid, pour order 1005): 3645,3780 3645,3675 3757.11,3675 3757.11,3780
GND on Top Layer "Top Layer-No Net" (solid, pour order 1006): 4200,4855 4200,4330 3740,4330 3740,4599.53 3775,4634.53 3775,4993.11 3745,5023.11 3745,5225 3965,5225 3965,5077.4 3840,4952.4 3840,4855
VCC5V on Top Layer "Top Layer-No Net" (solid, pour order 1007): 3340,4330 3135,4330 3135,4790 3340,4790
VCC3V3 on Top Layer "Top Layer-No Net" (solid, pour order 1008): 3340,3325 3135,3325 3135,3785 3340,3785
NetC650_1 on Top Layer "Top Layer-No Net" (solid, pour order 1009): 3135,5125 3615,5125 3615,4675 3695,4595 3695,4330 3375,4330 3375,4805 3135,4805
NetC645_1 on Top Layer "Top Layer-No Net" (solid, pour order 1010): 3135,4105 3615,4105 3615,3670 3690,3595 3690,3325 3375,3325 3375,3795 3135,3795
GND on Top Layer "Top Layer-No Net" (solid, pour order 1011): 4310,3845 4310,3320 3735,3320 3735,3589.53 3770,3624.53 3770,3983.11 3740,4013.11 3740,4215 3965,4215 3965,4072.4 3845,3952.4 3845,3845
NetCON600_1 on Top Layer "Top Layer-No Net" (solid, pour order 1012): 3135,5325 3919.96,5325 3919.96,5545 3565,5545 3565,5425 3430,5425 3430,5545 3135,5545
VCC9V on Top Layer "Top Layer-No Net" (solid, pour order 1013): 3985,5545 3985,5325 4215,5325 4215,4960 4050,4960 3980,4890 3880,4890 3880,4870 4215,4870 4215,3945 4045,3945 3985,3885 3885,3885 3885,3855 4310,3855 4310,5545
GND on GROUND (split plane): 4310.61,1345.07 3955,1345.07 3952.06,1344.78 3949.23,1343.93 3946.63,1342.53 3944.34,1340.66 3879.34,1275.66 3877.47,1273.37 3876.07,1270.77 3875.22,1267.94 3874.93,1265 3874.93,1130 3875.22,1127.06 3876.07,1124.23 3877.47,1121.63 3879.34,1119.34 3934.93,1063.76 3934.93,886.24 3874.34,825.66 3872.47,823.37 3871.07,820.77 3870.22,817.94 3869.93,815 3869.93,531.24 3653.76,315.07 2856.24,315.07 2730.07,441.24 2730.07,1145 2729.78,1147.94 2728.93,1150.77 2727.53,1153.37 2725.66,1155.66 2575.66,1305.66 2573.37,1307.53 2570.77,1308.93 2567.94,1309.78 2565,1310.07 1605,1310.07 1602.06,1309.78 1599.23,1308.93 1596.63,1307.53 1594.34,1305.66 1439.34,1150.66 1437.47,1148.37 1436.07,1145.77 1435.22,1142.94 1434.93,1140 1434.93,455 1435.22,452.06 1436.07,449.23 1437.47,446.63 1439.34,444.34 1479.93,403.76 1479.93,20.1 20.1,20.1 20.1,5885.41 2134.93,5885.41 2134.93,5435 2135.22,5432.06 2136.07,5429.23 2137.47,5426.63 2139.34,5424.34 2182.34,5381.34 2184.63,5379.47 2187.23,5378.07 2190.06,5377.22 2193,5376.93 2430,5376.93 2432.94,5377.22 2435.77,5378.07 2438.37,5379.47 2440.66,5381.34 2554.24,5494.93 2721.76,5494.93 2835.34,5381.34 2837.63,5379.47 2840.23,5378.07 2843.06,5377.22 2846,5376.93 3056,5376.93 3058.94,5377.22 3061.77,5378.07 3064.37,5379.47 3066.66,5381.34 3110.66,5425.34 3112.53,5427.63 3113.93,5430.23 3114.78,5433.06 3115.07,5436 3115.07,5885.41 4310.61,5885.41
EARTH on GROUND (split plane): 2699.93,1138.76 2699.93,435 2700.22,432.06 2701.07,429.23 2702.47,426.63 2704.34,424.34 2839.34,289.34 2841.63,287.47 2844.23,286.07 2847.06,285.22 2850,284.93 3660,284.93 3662.94,285.22 3665.77,286.07 3668.37,287.47 3670.66,289.34 3891.24,509.93 4310.61,509.93 4310.61,20.1 1510.07,20.1 1510.07,410 1509.78,412.94 1508.93,415.77 1507.53,418.37 1505.66,420.66 1465.07,461.24 1465.07,1133.76 1611.24,1279.93 2558.76,1279.93
EARTH_ETH on GROUND (split plane): 3084.93,5442.24 3049.76,5407.07 2852.24,5407.07 2738.66,5520.66 2736.37,5522.53 2733.77,5523.93 2730.94,5524.78 2728,5525.07 2548,5525.07 2545.06,5524.78 2542.23,5523.93 2539.63,5522.53 2537.34,5520.66 2423.76,5407.07 2199.24,5407.07 2165.07,5441.24 2165.07,5885.41 3084.93,5885.41
EARTH_USB on GROUND (split plane): 4310.61,540.07 3900.07,540.07 3900.07,808.76 3960.66,869.34 3962.53,871.63 3963.93,874.23 3964.78,877.06 3965.07,880 3965.07,1070 3964.78,1072.94 3963.93,1075.77 3962.53,1078.37 3960.66,1080.66 3905.07,1136.24 3905.07,1258.76 3961.24,1314.93 4310.61,1314.93
VCC3V3 on POWER (split plane): 489.93,5555 490.22,5552.06 491.07,5549.23 492.47,5546.63 494.34,5544.34 496.63,5542.47 499.23,5541.07 502.06,5540.22 505,5539.93 2165,5539.93 2167.94,5540.22 2170.77,5541.07 2173.37,5542.47 2175.66,5544.34 2326.24,5694.93 2943.48,5694.93 3099.93,5538.48 3099.93,4310 3100.22,4307.06 3101.07,4304.23 3102.47,4301.63 3104.34,4299.34 3106.63,4297.47 3109.23,4296.07 3112.06,4295.22 3115,4294.93 3973.76,4294.93 4109.93,4158.76 4109.93,1550.1 3180,1550.1 3178.05,1549.71 3176.4,1548.6 3052.89,1425.1 2942.18,1425.1 2940.23,1424.71 2938.58,1423.6 2697.89,1182.91 2549.3,1182.91 2423.6,1308.6 2421.95,1309.71 2420,1310.1 1997.11,1310.1 1903.6,1403.6 1901.95,1404.71 1900,1405.1 1820,1405.1 1818.05,1404.71 1816.4,1403.6 1781.4,1368.6 1780.29,1366.95 1779.9,1365 1779.9,990.07 925,990.07 922.06,989.78 919.23,988.93 916.63,987.53 914.34,985.66 912.47,983.37 911.07,980.77 910.22,977.94 909.93,975 909.93,20.1 20.1,20.1 20.1,5885.41 489.93,5885.41
VCC5V on POWER (split plane): 4310.61,20.1 940.07,20.1 940.07,959.93 1868.76,959.93 2379.34,449.34 2381.63,447.47 2384.23,446.07 2387.06,445.22 2390,444.93 3730,444.93 3732.94,445.22 3735.77,446.07 3738.37,447.47 3740.66,449.34 4135.66,844.34 4137.53,846.63 4138.93,849.23 4139.78,852.06 4140.07,855 4140.07,4165 4139.78,4167.94 4138.93,4170.77 4137.53,4173.37 4135.66,4175.66 3990.66,4320.66 3988.37,4322.53 3985.77,4323.93 3982.94,4324.78 3980,4325.07 3130.07,4325.07 3130.07,5544.72 3129.78,5547.66 3128.93,5550.49 3127.53,5553.1 3125.66,5555.38 2960.38,5720.66 2958.1,5722.53 2955.49,5723.93 2952.66,5724.78 2949.72,5725.07 2320,5725.07 2317.06,5724.78 2314.23,5723.93 2311.63,5722.53 2309.34,5720.66 2158.76,5570.07 520.07,5570.07 520.07,5885.41 4310.61,5885.41
VCC5V_USB on POWER (split plane): 4109.93,861.24 3723.76,475.07 3305.1,475.07 3305.1,790 3304.71,791.95 3303.6,793.6 3228.6,868.6 3226.95,869.71 3225,870.1 2910.1,870.1 2910.1,1107.89 2982.11,1179.9 3415,1179.9 3416.95,1180.29 3418.6,1181.4 3548.6,1311.4 3549.71,1313.05 3550.1,1315 3550.1,1454.9 3640,1454.9 3641.95,1455.29 3643.6,1456.4 3644.71,1458.05 3645.1,1460 3645.1,1539.9 4109.93,1539.9
VCC1V3 on POWER (split plane): 198 vertices, not listed, extent 100.1,3800.1 1784.9,5064.9
AVCC3V3_CODEC on POWER (split plane): 1991.4,1301.4 1993.05,1300.29 1995,1299.9 2417.89,1299.9 2543.58,1174.21 2545.23,1173.11 2547.18,1172.72 2694.9,1172.72 2694.9,925 2695.29,923.05 2696.4,921.4 2756.4,861.4 2758.05,860.29 2760,859.9 3222.89,859.9 3294.9,787.89 3294.9,475.07 2396.24,475.07 1885.66,985.66 1883.37,987.53 1880.77,988.93 1877.94,989.78 1875,990.07 1790.1,990.07 1790.1,1362.89 1822.11,1394.9 1897.89,1394.9
VCC3V3_USB on POWER (split plane): 3634.9,1465.1 3545,1465.1 3543.05,1464.71 3541.4,1463.6 3540.29,1461.95 3539.9,1460 3539.9,1317.11 3412.89,1190.1 2980,1190.1 2978.05,1189.71 2976.4,1188.6 2901.4,1113.6 2900.29,1111.95 2899.9,1110 2899.9,870.1 2762.11,870.1 2705.1,927.11 2705.1,1175.7 2944.3,1414.9 3055,1414.9 3056.95,1415.29 3058.6,1416.4 3182.11,1539.9 3634.9,1539.9
VCC2V5 on POWER (split plane): 1539.9,5312.89 1539.9,5227.11 1476.4,5163.6 1475.29,5161.95 1474.9,5160 1474.9,5002.11 1426.4,4953.6 1425.29,4951.95 1424.9,4950 1424.9,4920 1425.29,4918.05 1426.4,4916.4 1436.4,4906.4 1438.05,4905.29 1440,4904.9 1542.89,4904.9 1559.9,4887.89 1559.9,4862.11 1547.89,4850.1 1420.08,4850.1 1419.71,4851.95 1418.6,4853.6 1403.6,4868.6 1401.95,4869.71 1400,4870.1 1390.1,4870.1 1390.1,4977.89 1428.41,5016.2 1429.51,5017.85 1429.9,5019.8 1429.9,5085.2 1429.51,5087.15 1428.41,5088.8 1405.1,5112.11 1405.1,5312.89 1442.74,5350.53 1502.26,5350.53
AVCC3V3_PHY on POWER (split plane): 2574.9,4108.89 2574.9,3956.11 2556.89,3938.1 2538.11,3938.1 2532.1,3944.11 2532.1,3993 2531.71,3994.95 2530.6,3996.6 2496.6,4030.6 2494.95,4031.71 2493,4032.1 2406.11,4032.1 2395.1,4043.11 2395.1,4120.89 2404.11,4129.9 2553.89,4129.9

## Keep-outs
Keep-Out Layer:
  the board outline again, w3.94

## Other copper
GROUND (plane layer: these items are gaps in the copper):
  lines w30: 1495,0 1495,410 1450,455 1450,1140 1605,1295 2565,1295 2715,1145 2715,435 2850,300 3660,300 3885,525 ; 2150,5905.51 2150,5435 2193,5392 2430,5392 2548,5510 2728,5510 2846,5392 3056,5392 3100,5436 3100,5905.51 ; 4330.71,525 3885,525 ; 4330.71,1330 3955,1330 3890,1265 3890,1130 3950,1070 3950,880 3885,815 3885,525
POWER (plane layer: these items are gaps in the copper):
  lines w10: 1385,4865 1385,4980 1424.8,5019.8 1424.8,5085.2 1400,5110 1400,5315 1440.63,5355.63 1504.37,5355.63 1545,5315 1545,5225 1480,5160 1480,5000 1430,4950 1430,4920 1440,4910 1545,4910 1565,4890 1565,4860 1550,4845 1415,4845 ; 1785,975 1785,1365 1820,1400 1900,1400 1995,1305 2420,1305 2547.18,1177.81 2700,1177.81 ; 3300,460 3300,790 3225,865 2905,865 ; 4125,1545 3640,1545 ; 2700,1177.81 2700,925 2760,865 2905,865 ; 2700,1177.81 2942.18,1420 3055,1420 3180,1545 3200,1545 3640,1545 ; 2905,865 2905,1110 2980,1185 3415,1185 3545,1315 3545,1460 3640,1460 3640,1545 ; 95,4835 95,5025 140,5070 670,5070 885,4855 925,4815 925,4740 935,4730 970,4730 995,4755 995,4843.27 1016.73,4865 1051.1,4865 1075,4865 1090,4850 1090,4685 1100,4675 1150,4675 1170,4695 1170,4845 1190,4865 1225,4865 1240,4850 1240,4690 1255,4675 1325,4675 1350,4700 1350,4850 1365,4865 1400,4865 1415,4850 1415,4685.93 1555.93,4545 1715.67,4545 1740,4520.67 1740,4505 1716.61,4481.61 1600.55,4481.61 1575,4456.06 1575,4380 1588.21,4366.79 1633.21,4366.79 1685,4315 1739.13,4315 1750,4304.13 1750,4285 1730.08,4265.08 1667.91,4265.08 1637.99,4295 1605,4295 1585,4275 1585,4215 1610,4190 1625,4190 1645,4170 1645,4155 1625,4135 1590,4135 1575,4120 1575,4061.79 1591.79,4045 1775,4045 1790,4030 1790,3990 1770,3970 1575,3970 1550,3995 1420,3995 1360,3935 1360,3810 1345,3795 1320,3795 1305,3810 1305,3937.28 1247.28,3995 1110,3995 1060,3945 1060,3820 1045,3805 965,3805 950,3820 950,3980.3 870.3,4060 703.23,4060 680,4083.23 680,4100 700,4120 815,4120 895,4200 895,4340 835,4400 795,4400 770,4375 690,4375 670,4395 670,4417.56 687.44,4435 748.23,4435 793.23,4480 823.7,4480 840,4496.3 840,4580 625,4795 135,4795 95,4835 ; 2390,4041 2390,4123 2402,4135 2556,4135 2580,4111 2580,3954 2559,3933 2536,3933 2527,3942 2527,3993 2493,4027 2404,4027 2390,4041
  lines w30: 505,5905.51 505,5555 2165,5555 2320,5710 2949.72,5710 3115,5544.72 3115,4310 3980,4310 4125,4165 4125,855 3730,460 2390,460 1875,975 925,975 925,0

## Silkscreen, mask and mechanical layers (free items; w line width, h text height)
Top Overlay:
  lines w10: 105,4805 310,4805 310,4895 105,4895 105,4805 ; 3300,3335 3300,3425 3505,3425 3505,3335 3300,3335 ; 3300,4340 3300,4430 3505,4430 3505,4340 3300,4340
  text "1V3" at 135,4820 h60
  text "5V" at 3350,4355 h60
  text "3V3" at 3320,3350 h60

## Text inside footprints (layer, text, board x,y; h text height)
BID500: Top Overlay "JAN / 2011" at 2795,55 h118.11; Top Overlay "Rômulo Mendes" at 2795,205 h118.11
S200: Top Overlay "3" at 185.71,2150.51 h30; Top Overlay "2" at 290.71,2150.51 h30; Top Overlay "1" at 395.71,2150.51 h30; Top Overlay "ON" at 460,1758 h30